# Altium PCB TEG_ver4_PCB2.PcbDoc
Units mil, origin at the board's own origin, x right, y up, seen from the top; angles counter-clockwise.
Board outline 2120.03 x 975.03 mil, 2 copper layers (Top Layer, Bottom Layer); 12 components, 13 nets, 44 pads, 0 vias.
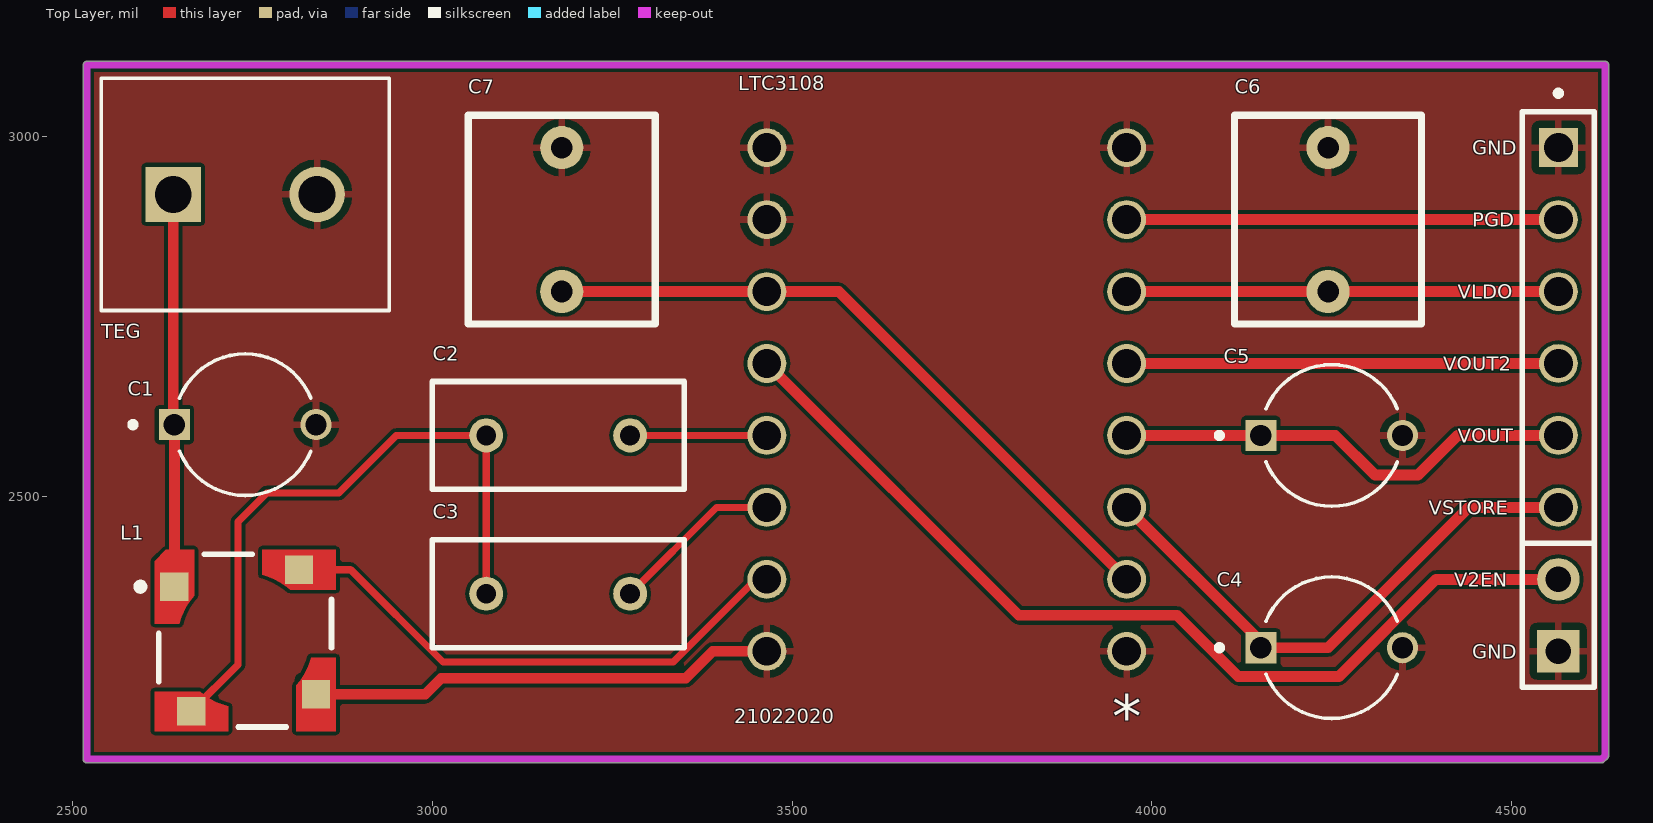
[diagram p0: Top Layer view]
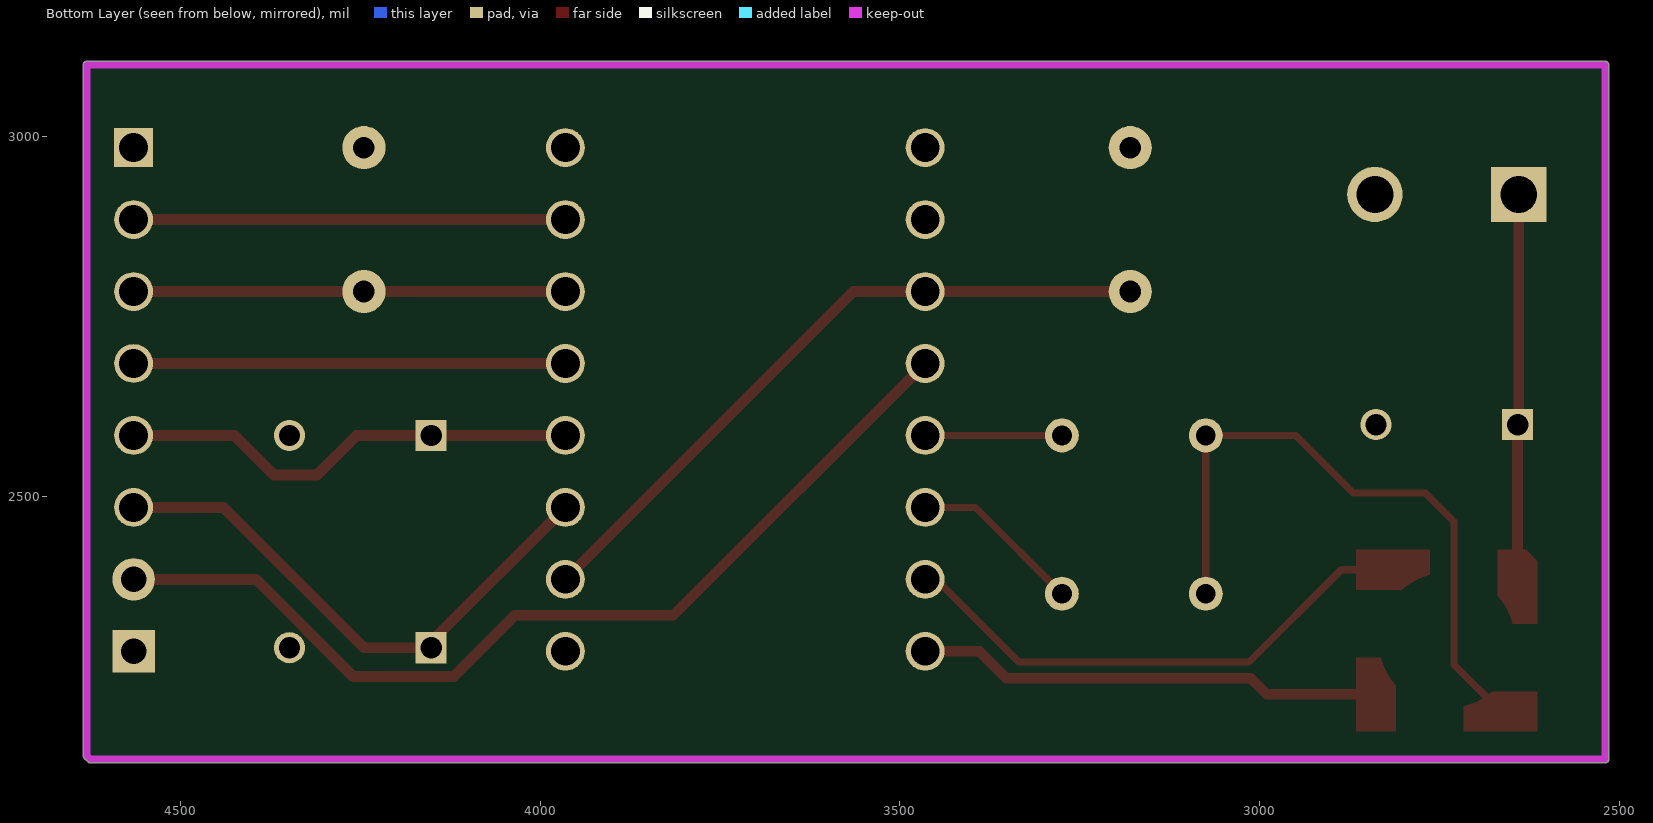
[diagram p1: Bottom Layer view, seen from below]

## Layer stack, top to bottom
Top Solder: solder mask 0.4, Solder Resist, Dk 3.5
Top Layer: signal copper 1.4
Dielectric 1: dielectric 12.6, FR-4, Dk 4.8
Bottom Layer: signal copper 1.4
Bottom Solder: solder mask 0.4, Solder Resist, Dk 3.5

## Board outline
2514.99,2135 ccw(c2520,2135) 2520,2129.99 4625,2129.99 ccw(c4625,2135) 4628.56,2131.47 4628.55,2131.45 4633.55,2136.45 4633.53,2136.44 ccw(c4630,2140) 4635.02,2140 4635.02,3100 ccw(c4630,3100) 4630,3105.01 2520,3105.01 ccw(c2520,3100) 2514.99,3100

## Design rules (kind name [scope] priority, off if disabled: settings)
Clearance [All] p1: gap=5 ignorepadtopadclearanceinfootprint=FALSE
PolygonConnect [All] p1: connectstyle=Relief reliefconductorwidth=10 reliefentries=4 polygonreliefangle="90 Angle" airgapwidth=10
RoutingVias [All] p1: holewidth=28 width=50 viastyle="Through Hole" minholewidth=28 minwidth=50 maxholewidth=28 maxwidth=50
SolderMaskExpansion [All] p1: expansion=4
Width power [InNetClass('power')] p1: maxlimit=15 minlimit=10 preferedwidth=15
Width signal [InNetClass('signal')] p2: maxlimit=10 minlimit=10 preferedwidth=10
30 further rules are at their usual default settings.

## Classes and differential pairs
net class signal: C1 C2 NetC2_1 SW
net class power: GND IN PGD VAUX VLDO VOUT VOUT2 VOUT2_EN VSTORE
component class TEG_ver4_sheet1: C1 C2 C3 C4 C5 C6 C7 L1 LTC3108 TEG ""

## Components (designator, comment, footprint, x,y, rotation, side; value= is the part's Value field where it differs from the comment)
C1 "220uF" CAPPRD500W50D500H1100 2740,2600 r0 top
C2 "Cap" RAD-0.2 3175,2585 r0 top value=1nF
C3 "Cap" RAD-0.2 3175,2365 r0 top value=330pF
C4 "220uF" CAPPRD500W50D500H1100 4250,2290 r0 top
C5 "220uF" CAPPRD500W50D500H1100 4250,2585 r0 top
C6 "Cap" PCBComponent_1#1 4245,2785 r90 top value=2.2uF
C7 "Cap" PCBComponent_1#1 3180,2785 r90 top value=2.2uF
J1 "Header 2" HDR1X2 4565,2285 r90 top
J2 "MTSW-106-09-G-S-250" SAMTEC_MTSW-106-09-G-S-250 4565,2735 r90 top
L1 "7µH / 70000µH" WE-EHPI_5838 2740,2300 r0 top
LTC3108 "LTC3108IGN#PBF" PCBComponent_1#2 3965,2985 r180 top
TEG "TB006-508-02BE" CUI_TB006-508-02BE 2640,2920 r0 top

## Footprints (in the part's own frame and the unit in brackets; to place one, negate y for a bottom-side part, rotate by r counter-clockwise, add the part's x,y. Pads: shape width x height; smd on the part's side, far side on the other; paste and mask are expansions set on the pad)
CAPPRD500W50D500H1100 [mm]
  round 1.1 hole 0.75: N(2.5,0)
  rect 1.1x1.1 hole 0.75: P(-2.5,0)
  silkscreen extent -4.06,-2.5 2.32,2.5, body extent -2.75,-2.5 2.75,2.5, height 11
CUI_TB006-508-02BE [mm]
  rect 1.95x1.95 / inner round 1.95 / far side rect 1.95x1.95 hole 1.3: 1(0,0)
  round 1.95 hole 1.3: 2(5.08,0)
  silkscreen extent -2.54,-4.1 7.62,4.1, body extent -2.79,-4.06 7.87,4.14, height 10
HDR1X2 [mm] "Connector; Header; 2 Position"
  rect 1.5x1.5 hole 0.9: 1(0,0)
  round 1.5 hole 0.9: 2(2.54,0)
  silkscreen extent -1.27,-1.27 3.81,1.27
PCBComponent_1#1 [mil]
  round 60 hole 30: 1(0,0) 2(200,0)
  silkscreen extent -45,-130 245,130, body extent -42,-128 242,128, height 315
PCBComponent_1#2 [mil]
  round 54 hole 40: 1(0,700) 2(0,600) 3(0,500) 4(0,400) 5(0,300) 6(0,200) 7(0,100) 8(0,0) 9(500,0) 10(500,100) 11(500,200) 12(500,300) 13(500,400) 14(500,500) 15(500,600) 16(500,700)
  body extent -47,-60 548,760, height 335
RAD-0.2 [mm] "Radial Cap, Thru-Hole; 2 Leads; 0.2 in Pin Spacing"
  round 1.2 hole 0.7: 1(-2.54,0) 2(2.54,0)
  silkscreen extent -4.44,-1.91 4.44,1.91
SAMTEC_MTSW-106-09-G-S-250 [mm]
  rect 1.37x1.37 / inner round 1.37 / far side rect 1.37x1.37 hole 1.02: 01(6.35,0)
  round 1.37 hole 1.02: 02(3.81,0) 03(1.27,0) 04(-1.27,0) 05(-3.81,0) 06(-6.35,0)
  silkscreen extent -7.62,-1.27 8.37,1.27
WE-EHPI_5838 [mm] "Power Inductor 4-Leads, SMD, Body 6x6mm"
  rect 1x1 smd paste-403.566 mask-403.566: 1(-2.5,1.9) 2(1.9,2.5) 3(2.5,-1.9) 4(-1.9,-2.5)
  Top Layer region: -3.2,0.6 -3.2,2.8 -2.8,3.2 -1.8,3.2 -1.8,1.588 -1.8,1.587 -2.12,1.125 -2.324,0.6 -2.324,0.6 -2.324,0.6
  Top Layer region: -0.6,-3.2 -3.2,-3.2 -3.2,-1.8 -1.588,-1.8 -1.125,-2.12 -0.6,-2.324 -0.6,-2.324
  Top Layer region: 3.2,-0.6 3.2,-3.2 1.8,-3.2 1.8,-1.588 2.12,-1.125 2.324,-0.6 2.324,-0.6
  Top Layer region: 0.6,3.2 3.2,3.2 3.2,1.8 1.588,1.8 1.125,2.12 0.6,2.324 0.6,2.324
  silkscreen extent -3.82,-3.05 3.05,3.05, body extent -3,-3 3,3, height 4

## Part data
C1 C4 C5: library part EEUFS0J221B, "Aluminum Electrolytic Capacitors, 220uF, 6.3V, -40 to 105C", Package="RADIAL-2 Panasonic", =220uF, Availability="In Stock", Check_prices=https://www.snapeda.com/parts/EEUFS0J221B/Panasonic/view-part/5796863/?ref=eda, MF=Panasonic, MP=EEUFS0J221B, Price=None, Purchase-URL=https://pricing.snapeda.com/search/part/EEUFS0J221B/?ref=eda, SnapEDA_Link=https://www.snapeda.com/parts/EEUFS0J221B/Panasonic/view-part/5796863/?ref=snap
C2 C3 C6 C7: "Capacitor", LatestRevisionDate=17-Jul-2002, LatestRevisionNote="Re-released for DXP Platform.", PackageDescription="Radial Cap, Thru-Hole; 2 Leads; 0.3 in Pin Spacing", PackageReference=RAD-0.3, Published=8-Jun-2000, Publisher="Altium Limited"
J1: "Header, 2-Pin", LatestRevisionDate=17-Jul-2002, LatestRevisionNote="Re-released for DXP Platform.", Publisher="Altium Limited"
J2: Package=None, Availability=Unavailable, MP=MTSW-106-09-G-S-250, Price=None
L1: library part 74488540070, "WE-EHPI SMT Energy Harvesting Coupled Inductor, size 5838, 7µH / 70000µH, 1:100, 1.9A", Case/Size Code=5838, DC Resistance 1=0.085O, DC Resistance 2=205O, DC Resistance Max 1=0.095O, DC Resistance Max 2=240O, Inductance 1=7µH, Inductance 2=70000µH, Manufacturer="Wurth Elektronik", Operating Temperature Max=125°C, Operating Temperature Min=-40°C, Rated Current=1.9A, Saturation Current=1.3A, Category="Coupled Power Inductors", ComponentLink1Description="Website Link", ComponentLink1URL=https://www.we-online.com/redexpert/article/74488540070?ad, ComponentLink2Description="Datasheet Link", ComponentLink2URL=https://www.we-online.com/redexpert/spec/74488540070?ad, Height=4mm, Length=6mm, Manufacturer Part Number=74488540070, Match Code=WE-EHPI, Mount="Surface Mount", Packaging="Tape and Reel", Turns Ratio=1:100, Width=6mm
LTC3108: "LTC3108 - Ultralow Voltage Step-Up Converter and Power Manager", Package="SSOP-16 Linear Technology", Check_prices=https://www.snapeda.com/parts/LTC3108IGN%23PBF/Analog+Devices/view-part/?ref=eda, MF="Analog Devices", MP=LTC3108IGN#PBF, SnapEDA_Link=https://www.snapeda.com/parts/LTC3108IGN%23PBF/Analog+Devices/view-part/?ref=snap
TEG: "2~24 Poles, Screw Type, Horizontal, 5.08 Pitch, 26~14 (AWG), Terminal Block Connector", Package=None, Check_prices=https://www.snapeda.com/parts/TB006-508-02BE/Same+Sky/view-part/?ref=eda, MF="Same Sky", MP=TB006-508-02BE, SnapEDA_Link=https://www.snapeda.com/parts/TB006-508-02BE/Same+Sky/view-part/?ref=snap

## Nets (pads, with @x,y where several pads share a name; then routed paths per layer and width w, separated by ;. In a path a pad name is that pad's centre, name@x,y a point inside that pad or via, vN(x,y) a via of type N, cw(c..) or ccw(c..) an arc to the next point about the centre after c; other vN are vias at no path point)
C1: C2.2 LTC3108.13 | length 190
  Top Layer w10: C2.2 LTC3108.13
C2: C3.2 LTC3108.14 | length 239.7
  Top Layer w10: C3.2 3395,2485 LTC3108.14
GND: C1.N C4.N C5.N C6.2 C7.2 J1.1 J2.01 L1.3 LTC3108.1 LTC3108.8 LTC3108.9 LTC3108.10 LTC3108.16 TEG.2 | length 651.3
  Top Layer w15: L1.3 2990.2,2225.2 3012.5,2247.5 3352.25,2247.5 3389.75,2285 LTC3108.16
IN: C1.P L1.1 TEG.1 | length 545.8
  Top Layer w15: TEG.1 2640,2601.57 C1.P L1.1
NetC2_1: C2.1 C3.1 L1.4 | length 905
  Top Layer w10: L1.4 2730,2266.38 2730,2465 2770,2505 2870,2505 2950,2585 C2.1 C3.1
PGD: J2.02 LTC3108.7 | length 600
  Top Layer w15: LTC3108.7 J2.02
SW: L1.2 LTC3108.15 | length 751
  Top Layer w10: L1.2 2886.57,2398.43 3015,2270 3335,2270 3450,2385 LTC3108.15
VAUX: C7.1 LTC3108.2 LTC3108.11 | length 950.7
  Top Layer w15: C7.1 LTC3108.11 3565,2785 LTC3108.2
VLDO: C6.1 J2.03 LTC3108.6 | length 600
  Top Layer w15: LTC3108.6 C6.1 J2.03
VOUT: C5.P J2.05 LTC3108.4 | length 645.6
  Top Layer w15: LTC3108.4 C5.P 4255,2585 4310,2530 4370,2530 4425,2585 J2.05
VOUT2: J2.04 LTC3108.5 | length 600
  Top Layer w15: LTC3108.5 J2.04
VOUT2_EN: J1.2 LTC3108.12 | length 1336.1
  Top Layer w15: LTC3108.12 3815,2335 4035,2335 4120,2250 4260,2250 4395,2385 J1.2
VSTORE: C4.P J2.06 LTC3108.3 | length 766.5
  Top Layer w15: LTC3108.3 4151.57,2298.43 C4.P 4245,2290 4440,2485 J2.06

## Polygon pours and split planes (outlines as drawn)
GND on Top Layer "GND" (solid, pour order 0): 2520,3100 4630,3100 4630,2140 4625,2135 2520,2135

## Keep-outs
Keep-Out Layer:
  lines w10: 2520,2135 4625,2135 4630,2140 4630,3100 2520,3100 2520,2135

## Silkscreen, mask and mechanical layers (free items; w line width, h text height)
Top Overlay:
  text "GND" at 4445,2975 h20
  text "PGD" at 4445,2875 h20
  text "VLDO" at 4425,2775 h20
  text "VOUT2" at 4405,2675 h20
  text "VOUT" at 4425,2575 h20
  text "VSTORE" at 4385,2475 h20
  text "V2EN" at 4420,2375 h20
  text "GND" at 4445,2275 h20
  text "21022020" at 3420,2185 h20
  text "*" at 3945,2165 h60